# Altium PCB Agulhas.PcbDoc
Units mm, origin at the board's own origin, x right, y up, seen from the top; angles counter-clockwise.
Board outline 150 x 100 mm, 2 copper layers (Top Layer, Bottom Layer); 48 components, 30 nets, 135 pads, 0 vias.
Unrouted connection lines stored in the file: 3.
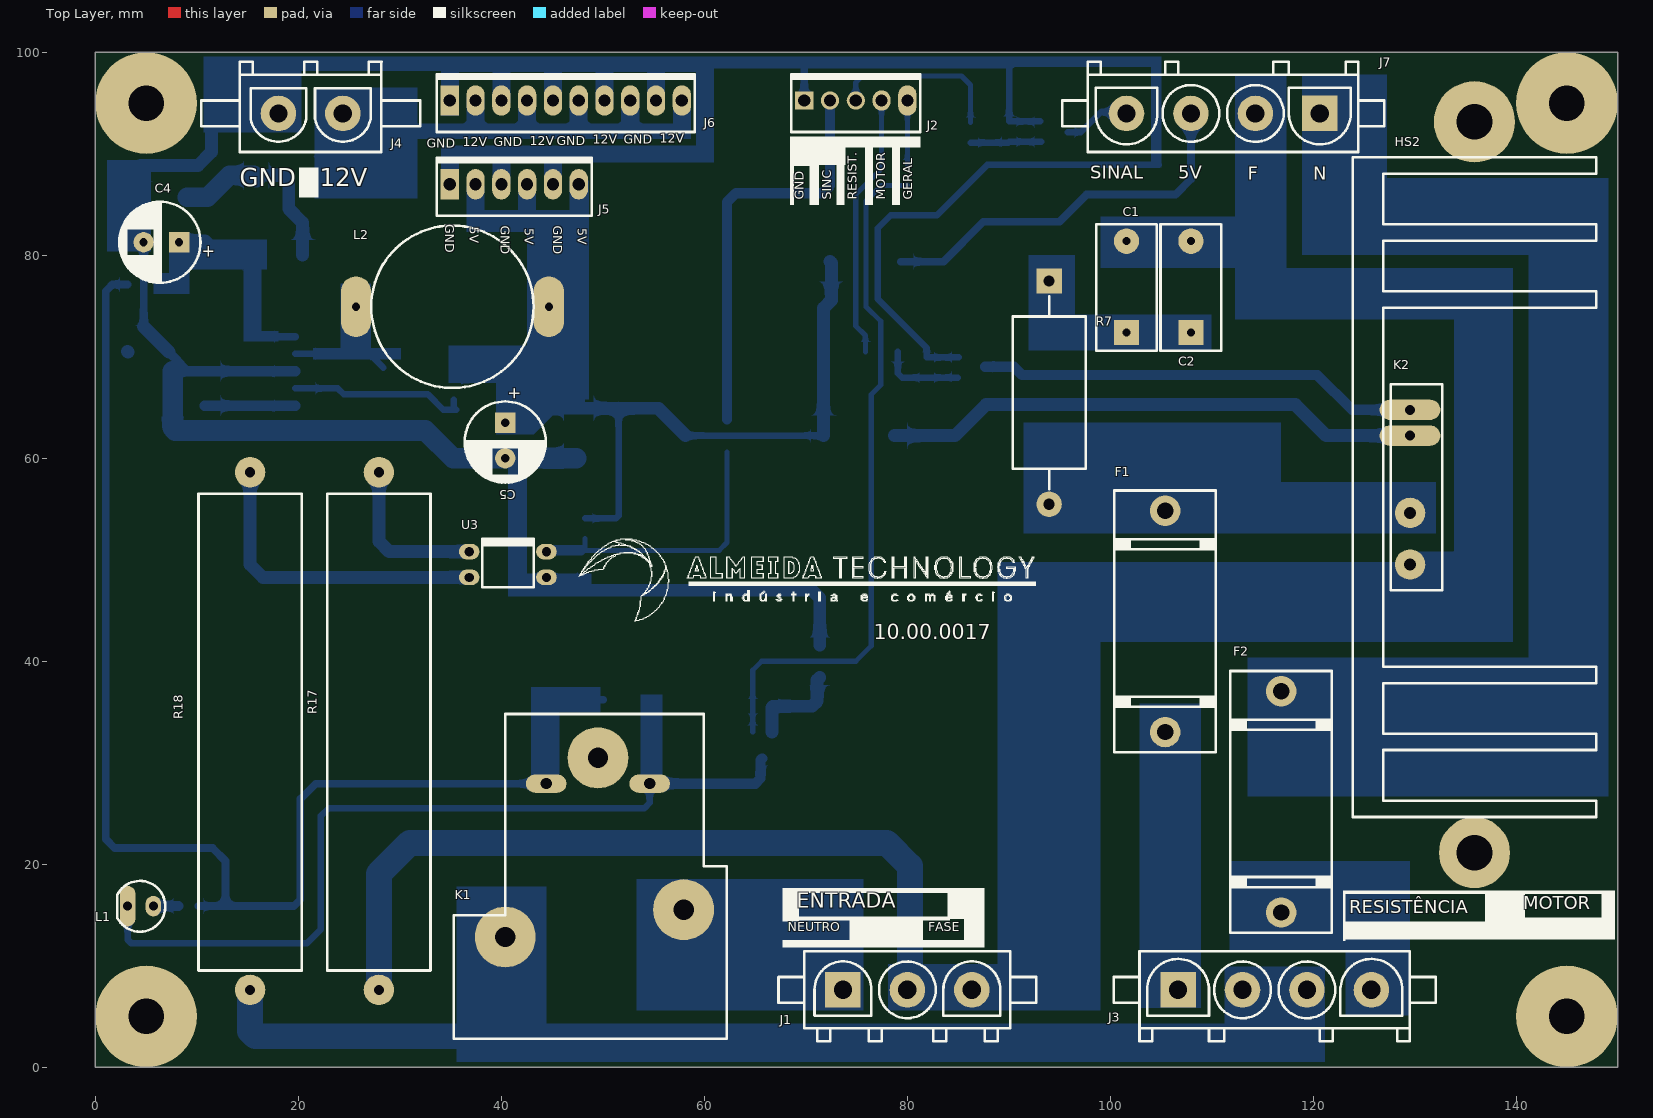
[diagram p0: Top Layer view]
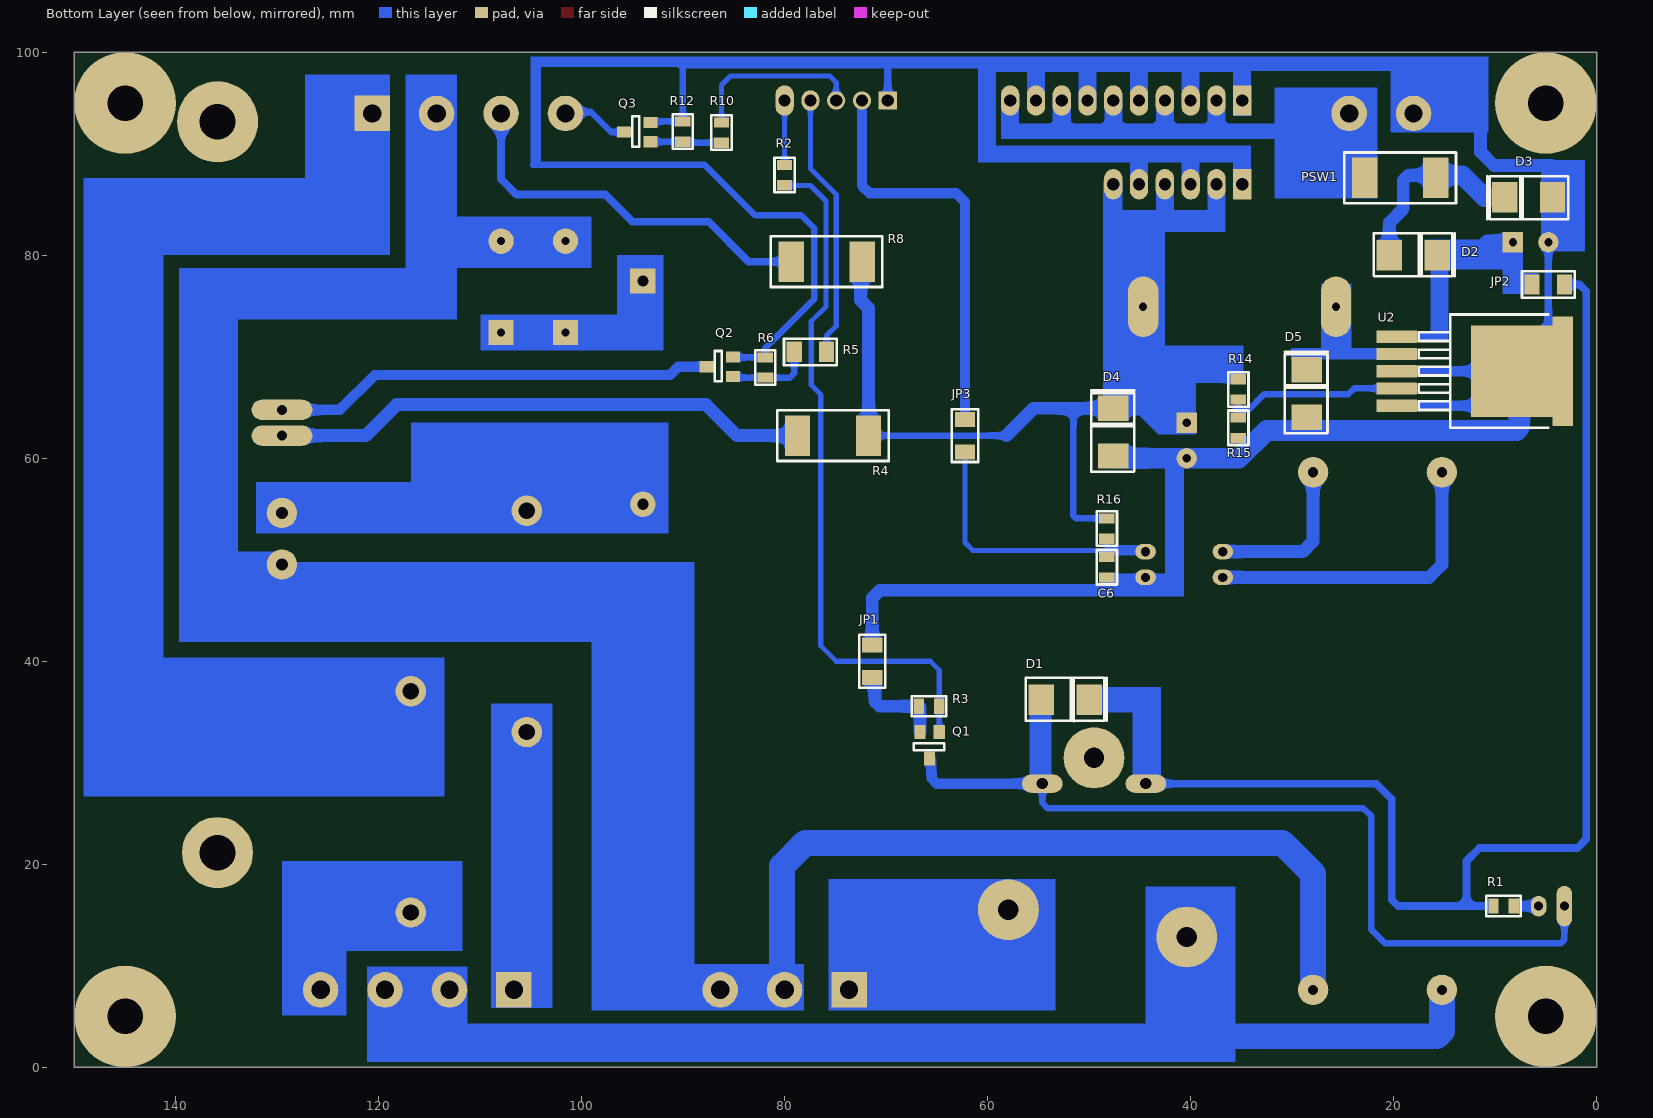
[diagram p1: Bottom Layer view, seen from below]
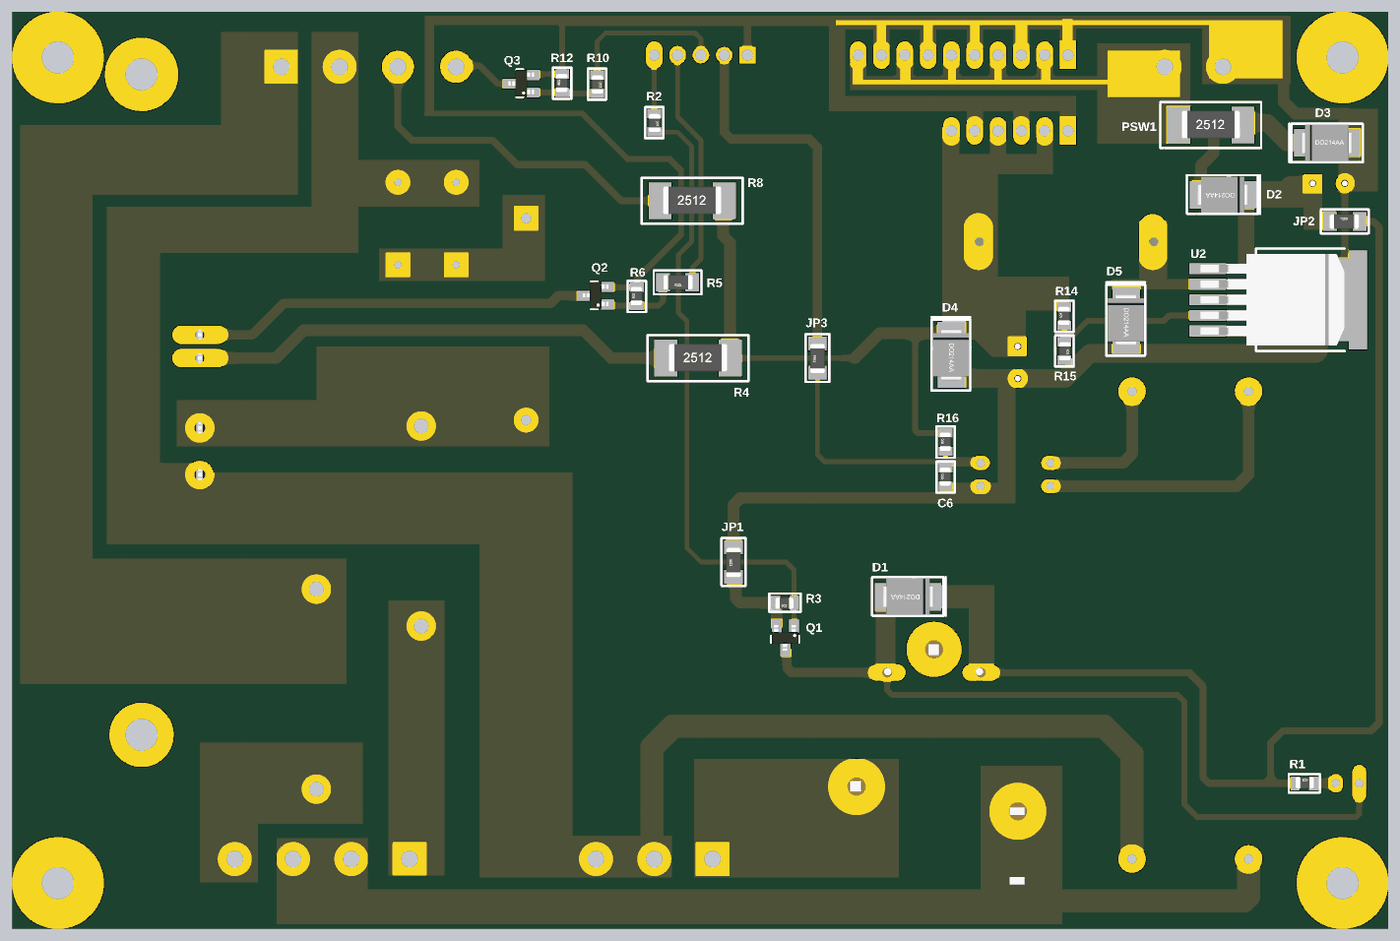
[diagram p2: 3D render of the assembled board from below, using the file's embedded part models]

## Layer stack, top to bottom
Top Solder: solder mask 0.0102, Solder Resist, Dk 3.5
Top Layer: signal copper 0.0356
Dielectric 1: dielectric 0.32, FR-4, Dk 4.8
Bottom Layer: signal copper 0.0356
Bottom Solder: solder mask 0.0102, Solder Resist, Dk 3.5

## Board outline
0,0 150,0 150,100 0,100

## Design rules (kind name [scope] priority, off if disabled: settings)
Clearance [All] p1: gap=0.508
PolygonConnect [All] p1: connectstyle=Relief reliefconductorwidth=0.254 reliefentries=4 polygonreliefangle="90 Angle" airgapwidth=0.254
RoomDefinition Sincronismo [InComponentClass('Sincronismo')] p1: confinementstyle=ConfineIn formatcopy=TRUE lockcomponents=FALSE outline -29.083,-63.881 21.717,-63.881 21.717,-38.481 -29.083,-38.481
RoomDefinition Regulador [InComponentClass('Regulador')] p2: confinementstyle=ConfineIn formatcopy=TRUE lockcomponents=FALSE outline -29.083,-63.881 21.717,-63.881 21.717,-38.481 -29.083,-38.481
RoomDefinition Potencia [InComponentClass('Potencia')] p3: confinementstyle=ConfineIn formatcopy=TRUE lockcomponents=FALSE outline -29.083,-63.881 21.717,-63.881 21.717,-38.481 -29.083,-38.481
RoomDefinition Conectores [InComponentClass('Conectores')] p4: confinementstyle=ConfineIn formatcopy=TRUE lockcomponents=FALSE outline -29.083,-63.881 21.717,-63.881 21.717,-38.481 -29.083,-38.481
RoutingVias [All] p1: holewidth=0.711 width=1.27 viastyle="Through Hole" minholewidth=0.711 minwidth=1.27 maxholewidth=0.711 maxwidth=1.27
SolderMaskExpansion [All] p1: expansion=0.102
UnpouredPolygon [All] p1: allowunpoured=FALSE
Width [All] p1: maxlimit=12.7 minlimit=0.254 preferedwidth=0.508
29 further rules are at their usual default settings.

## Classes and differential pairs
component class Sincronismo: C6 R16 R17 R18 U3
component class Regulador: C4 C5 D2 D3 D4 D5 J4 JP1 JP2 L2 PSW1 R14 R15 U2
component class Potencia: C1 C2 D1 F1 F2 HS2 J2 J7 JP3 K1 K2 L1 Q1 Q2 Q3 R1 R2 R3 R4 R5 R6 R7 R8 R10 R12
component class Conectores: J1 J3 J5 J6

## Components (designator, comment, footprint, x,y, rotation, side; value= is the part's Value field where it differs from the comment)
C1 "33nF/400V" "cap 330nF/250V" 101.6,72.39 r90 top
C2 "33nF/400V" "cap 330nF/250V" 107.95,72.39 r90 top
C4 "220uF/35V" "CAP POL 8x12mm" 8.255,81.28 r180 top
C5 "470uF/35V" "CAP POL 8x12mm" 40.386,63.5 r270 top
C6 "NM" "0805-REVISADO ONDA" 48.26,48.26 r90 bottom
D1 "1N4007-SMA" "SMB/DO214AA-REVISADO ONDA" 54.61,36.195 r180 bottom
D2 "1N4007-SMA" "SMB/DO214AA-REVISADO ONDA" 20.32,80.01 r180 bottom
D3 "SMBJ30.0A" "SMB/DO214AA-REVISADO ONDA" 4.445,85.725 r0 bottom
D4 "SMBJ5.0A" "SMB/DO214AA-REVISADO ONDA" 47.625,60.325 r90 bottom
D5 "1N5819-SOD80" "SMB/DO214AA-REVISADO ONDA" 28.575,64.135 r90 bottom
F1 "ZH242" ZH242_REVISADO 105.41,33.02 r90 top
F2 "ZH242" ZH242_REVISADO 116.84,15.24 r90 top
HS2 "HS 40mm TO-220PÉ" "dissipador grande" 135.89,57.15 r90 top
J1 "HYLOCK FÊMEA 3 VIAS PARA PCB" "CONECTOR HYLOCK 3 VIAS" 73.66,7.62 r0 top
J2 "PCMC2-5" PCMC2-5 69.85,95.25 r0 top
J3 "HYLOCK-FÊMEA 4 VIAS PARA PCB" "CONECTOR HYLOK 4 VIAS" 106.68,7.62 r0 top
J4 "HYLOCK 2 VIAS FÊMEA P/ PCB" "CONECTOR HYLOCK 2 VIAS" 24.384,93.98 r180 top
J5 "PCMC2-6" PCMC2-6 34.925,86.995 r0 top
J6 "PCMC2-10" PCMC2-10 34.925,95.25 r0 top
J7 "HYLOCK 4 VIAS PCB" "CONECTOR HYLOK 4 VIAS" 120.65,93.98 r180 top
JP1 "0R-1206-5%" "1206-REVISADO ONDA" 71.374,40.005 r90 bottom
JP2 "0R-1206-5%" "1206-REVISADO ONDA" 4.755,77.125 r180 bottom
JP3 "0R-1206-5%" "1206-REVISADO ONDA" 62.23,62.23 r90 bottom
K1 "RELE SLA-1-D-12" "rele gigante" 58.42,12.7 r90 top
K2 "S202S01" S202S02 129.54,49.53 r90 top
L1 "LED VERMELHO 5mm" LED100 4.445,15.875 r270 top
L2 "ferrite-CNF15+fio" "INDUTOR LOCO" 43.18,74.93 r180 top
PSW1 "NANOSMDC020F-2" "2512 - REVISADO ONDA" 22.86,87.63 r180 bottom
Q1 "BC846" "SOT23 - REVISADO ONDA" 64.77,33.02 r0 bottom
Q2 "BC846" "SOT23 - REVISADO ONDA" 85.09,68.072 r90 bottom
Q3 "BC846" "SOT23 - REVISADO ONDA" 93.218,91.186 r90 bottom
R1 "22K-0805-5%" "0805-REVISADO ONDA" 10.16,15.875 r180 bottom
R2 "10K-0805-5%" "0805-REVISADO ONDA" 80.01,88.9 r270 bottom
R3 "10K-0805-5%" "0805-REVISADO ONDA" 64.77,35.56 r0 bottom
R4 "220R-2512-5%" "2512 - REVISADO ONDA" 78.74,62.23 r180 bottom
R5 "10K-0805-5%" "1206-REVISADO ONDA" 77.47,70.485 r0 bottom
R6 "10K-0805-5%" "0805-REVISADO ONDA" 81.915,67.945 r90 bottom
R7 "47R-5W-5%" "RESISTOR 5W FIO" 93.98,77.47 r270 top
R8 "220R-2512-5%" "2512 - REVISADO ONDA" 79.375,79.375 r180 bottom
R10 "10K-0805-5%" "0805-REVISADO ONDA" 86.233,93.091 r270 bottom
R12 "10K-0805-5%" "0805-REVISADO ONDA" 90.043,91.186 r90 bottom
R14 "0R-0805-5%" "0805-REVISADO ONDA" 35.306,65.786 r90 bottom
R15 "NM" "0805-REVISADO ONDA" 35.306,64.008 r270 bottom
R16 "5K6-0805-5%" "0805-REVISADO ONDA" 48.26,52.07 r90 bottom
R17 "22K-10W-5%" "RESISTOR 10W CERAMICO" 27.94,7.62 r90 top
R18 "22K-10W-5%" "RESISTOR 10W CERAMICO" 15.24,7.62 r90 top
U2 "LM2575S-5.0" TO-263-5 5.842,68.58 r270 bottom
U3 "PC814" DIP-4 36.83,50.8 r0 top

## Footprints (in the part's own frame and the unit in brackets; to place one, negate y for a bottom-side part, rotate by r counter-clockwise, add the part's x,y. Pads: shape width x height; smd on the part's side, far side on the other; paste and mask are expansions set on the pad)
"0805-REVISADO ONDA" [mm]
  rect 1x1.5 smd: 1(0,0) 2(2,0)
  silkscreen extent -0.7,-1 2.7,1, body extent 0.04,-0.58 2.04,0.67, height 0.78
"1206-REVISADO ONDA" [mm]
  rect 1.5x2 smd: 1(-1.6,0) 2(1.6,0)
  silkscreen extent -2.6,-1.3 2.6,1.3, body extent -1.65,-0.81 1.55,0.79, height 1
"2512 - REVISADO ONDA" [mm]
  rect 2.5x4 smd: 1(0,0) 2(7,0)
  silkscreen extent -2,-2.5 9,2.5, body extent 0.33,-1.45 6.68,1.55, height 1.6
"cap 330nF/250V" [mm]
  rect 2.5x2.5 hole 0.8: 1(0,0)
  round 2.5 hole 0.8: 2(9,0)
  silkscreen extent -1.78,-3 10.67,3
"CAP POL 8x12mm" [mm]
  rect 2x2 hole 0.8: 1(0,0)
  round 2 hole 0.8: 2(3.5,0)
  silkscreen extent -2.1,-4 5.9,4, body extent -2.25,-3.97 5.75,4.03, height 12
"CONECTOR HYLOCK 2 VIAS" [mm]
  round 3.5 hole 1.8: 1(0,0) 2(6.35,0)
  silkscreen extent -7.62,-5.08 13.97,3.8
"CONECTOR HYLOCK 3 VIAS" [mm]
  rect 3.5x3.5 hole 1.8: 1(0,0)
  round 3.5 hole 1.8: 2(6.35,0) 3(12.7,0)
  silkscreen extent -6.35,-5.08 19.05,3.8
"CONECTOR HYLOK 4 VIAS" [mm]
  rect 3.5x3.5 hole 1.8: 1(0,0)
  round 3.5 hole 1.8: 2(6.35,0) 3(12.7,0) 4(19.05,0)
  silkscreen extent -6.35,-5.08 25.4,3.8
DIP-4 [mil] "DIP-4"
  oval 80x60 hole 36: 1(0,0) 2(0,-100) 3(300,-100) 4(300,0)
  silkscreen extent 50,-138 250,50
"dissipador grande" [mm]
  round 7 hole 3.5: ""(-36,0)
  round 8 hole 3.5: ""(36,0)
  silkscreen extent -32.5,-12 32.5,12
"INDUTOR LOCO" [mm]
  oval 3x6 hole 0.8: 1(-1.5,0) 2(17.5,0)
  silkscreen extent 0,-8 16,8, body extent -1.88,-7.47 18.12,7.53, height 13.1
LED100 [mm] "LED 5mm MONTADO NA VERTICAL"
  oval 2.032x1.524 hole 0.9: 1(0,1.27)
  oval 4x1.524 hole 0.9: 2(0,-1.27)
  silkscreen extent -2.48,-2.28 2.52,2.45
PCMC2-5 [mm] "KK 2,54mm 5 VIAS"
  rect 1.8x1.8 hole 1.2: 1(0,0)
  round 1.8 hole 1.2: 2(2.54,0) 3(5.08,0)
  oval 1.8x2 hole 1.2: 4(7.62,0)
  oval 1.8x3 hole 1.2: 5(10.16,0)
  silkscreen extent -1.27,-3.1 11.43,2.6
PCMC2-6 [mm]
  rect 1.8x3 hole 1.2: 1(0,0)
  oval 1.8x3 hole 1.2: 2(2.54,0) 3(5.08,0) 4(7.62,0) 5(10.16,0) 6(12.7,0)
  silkscreen extent -1.27,-3.1 13.97,2.6
PCMC2-10 [mm]
  rect 1.8x3 hole 1.2: 1(0,0)
  oval 1.8x3 hole 1.2: 2(2.54,0) 3(5.08,0) 4(7.62,0) 5(10.16,0) 6(12.7,0) 7(15.24,0) 8(17.78,0) 9(20.32,0) 10(22.86,0)
  silkscreen extent -1.27,-3.1 24.13,2.6
"rele gigante" [mm]
  oval 1.8x4 hole 1.1: 1(15.24,3.8) 2(15.24,14)
  round 6 hole 2: 3(0.127,18.034) 3'(17.78,8.9) 5(2.819,0.457)
  silkscreen extent -9.91,-3.81 22.1,23.11, body extent -9.91,-3.85 22.09,23.15, height 20.2
"RESISTOR 5W FIO" [mm] "RESISTOR 5W FIO"
  rect 2.5x2.5 hole 1.1: 1(0,0)
  round 2.5 hole 1.1: 2(22,0)
  silkscreen extent 1.5,-3.6 20.5,3.6
"RESISTOR 10W CERAMICO" [mm]
  round 3 hole 1: 1(0,0) 2(51,0)
  silkscreen extent 1.9,-5.08 48.89,5.08
S202S02 [mm]
  round 3 hole 1.2: 1(0,0) 2(5.08,0)
  oval 2x6 hole 1: 3(12.7,0) 4(15.24,0)
  silkscreen extent -2.54,-3.17 17.78,1.91, body extent -1.63,-3.86 16.87,1.65, height 29
"SMB/DO214AA-REVISADO ONDA" [mm]
  rect 2.5x3 smd: 1(-0.1,0) 2(4.599,0)
  silkscreen extent -1.65,-2.08 6.35,2.16, body extent -0.53,-1.94 5.06,2.01, height 2.6
"SOT23 - REVISADO ONDA" [mm]
  rect 1.1x1.4 smd: 1(0,0) 2(1.9,0) 3(0.95,2.6)
  silkscreen extent -0.5,1.1 2.5,1.8, body extent -0.45,-0.1 2.45,2.7, height 1.3
TO-263-5 [mm]
  rect 1.2x4 smd: 1(-3.4,-13.852) 2(-1.7,-13.852) 3(0,-13.852) 4(1.7,-13.852) 5(3.4,-13.852)
  rect 9x10 smd: 3(0,-1.524)
  rect 10.8x2 smd: 3(0,2.518)
  silkscreen extent -5.59,-11.68 5.59,1.07, body extent -5,-14.64 5,1.03, height 4.78
ZH242_REVISADO [mm] "PORTA FUSÍVEL ZH242 REVISADO EM 2015"
  round 3 hole 1.6: 1(0,0) 2(21.8,0)
  silkscreen extent -2,-5 23.8,5

## Part data
C1 C2 C6: library part 100nF/50-0805-NPO, "100nF/50-0805-NPO"
C4: library part 2200uF/50V, "2200uF/50V"
C5: library part 470uF/50V, "470uF/50V"
D1 D2: library part 1N4007, "1N4007"
F1 F2: library part "PORTA FUSÍVEL TIPO BERÇO", "PORTA FUSÍVEL TIPO BERÇO"
HS2: library part "DISSIPADOR 40mm PÉ"
J1: library part PCMC2-3, "PCMC2-3"
J3 J7: library part PCMC2-4, "PCMC2-4"
J4: library part PCMC2-2, "PCMC2-2"
JP1 JP2 JP3: library part 10R-0805-5%, "10R-0805-5%"
K1: library part AT1RC2, "AT1RC2"
K2: library part S102S12, "S102S12"
L2: library part "indutor 1mH CNF15", "1mH-CNF15-26 AWG"
PSW1: library part "POLYSWITCH 200mA"
Q1 Q2 Q3: "BC846L"
R1: library part 220R-2512-5%, "220R-2512-5%"
R14: library part 3K6-0805-1%, "3K6-0805-1%"
R15: library part 1K2-0805-1%, "1K2-0805-1%"
R16 R17 R18: library part 22K-0805-5%, "22K-0805-5%"
U2: library part LM2596S-ADJ, "LM2596S-ADJ"

## Free pads (board coordinates)
  round 10 hole 3.5: ""(5,5) ""(5,95) ""(144.997,5) ""(145,95)

## Nets (pads, with @x,y where several pads share a name; then routed paths per layer and width w, separated by ;. In a path a pad name is that pad's centre, name@x,y a point inside that pad or via, vN(x,y) a via of type N, cw(c..) or ccw(c..) an arc to the next point about the centre after c; other vN are vias at no path point)
5V: C5.1 D4.2 J5.2 J5.4 J5.6 L2.1 R4.2 R8.2 R14.2 R16.2 | length 113.2
  Bottom Layer w0.635: R16.2 51.276,54.07 51.562,54.356 51.562,64.924 ; 58.166,62.23 R4.2
  Bottom Layer w0.762: R14.2 39.91,67.786 40.386,67.31 C5.1
  Bottom Layer w1.27: J5.2 37.465,83.693 37.592,83.82 47.498,83.82 47.625,83.947 J5.6 ; C5.1 41.81,64.924 D4.2 ; 42.545,84.201 J5.4 ; 44.68,83.796 L2.1 44.68,69.874 47.625,66.929 D4.2 ; 58.166,62.23 55.472,64.924 51.562,64.924 D4.2 ; R4.2 71.74,74.788 72.517,75.565 72.517,79.233 R8.2
11V: C4.1 D1.2 D2.2 JP2.1 JP2.2 K1.2 R1.1 U2.1 | length 157.9
  Bottom Layer w0.762: JP2.2 1.687,77.125 1.27,76.708 1.016,76.454 1.016,75.946 1.016,22.479 1.905,21.59 11.557,21.59 12.827,20.32 12.827,15.875 ; JP2.1 7.529,77.125 8.128,77.724 8.128,81.153 C4.1 ; R1.1 12.827,15.875 ; D2.2 15.24,79.529 15.24,72.644 15.904,71.98 U2.1 ; D1.2 45.212,36.195 44.42,35.403 K1.2 21.717,27.94 20.193,26.416 20.193,16.51 19.558,15.875 12.827,15.875
  Bottom Layer w1.524: C4.1 10.795,81.28 12.065,80.01 D2.2
12V: J4.1 J6.2 J6.4 J6.6 J6.8 J6.10 PSW1.1 | length 55.2
  Bottom Layer w1.27: 24.765,91.44 30.48,91.44 31.242,92.202 37.465,92.202 ; J6.2 37.465,92.202 ; J6.4 42.545,92.202 ; J6.6 47.625,92.202 ; J6.8 52.705,92.202 ; J6.10 57.785,92.456 57.531,92.202 52.705,92.202 ; 37.465,92.202 42.545,92.202 ; 42.545,92.202 47.625,92.202 ; 47.625,92.202 52.705,92.202
  Bottom Layer w2.54: PSW1.1@22.86,87.884 22.86,89.535 24.13,90.805 24.13,93.726 J4.1
ENTRADA_FASE: C1.2 C2.2 J1.2 J1.3 J7.2 K2.1 R17.1 | length 247.8
  Bottom Layer w2.54: R17.1 27.94,19.05 30.988,22.098 77.978,22.098 80.264,19.812 80.264,7.874 J1.2 J1.3 88.9,7.62 91.44,10.16 91.44,41.91 92.71,43.18 135.89,43.18 137.16,44.45 137.16,49.53 ; J7.2 114.3,77.47 115.57,76.2 135.89,76.2 137.16,74.93 137.16,49.53 ; K2.1 137.16,49.53
GND: C4.2 C5.2 C6.1 D3.1 D4.1 D5.1 J2.1 J4.2 J5.1 J5.3 J5.5 J6.1 J6.3 J6.5 J6.7 J6.9 JP1.1 JP1.2 Q1.2 Q2.2 Q3.2 R3.2 R6.2 R12.2 R15.2 U2.3 U2.5 U3.3 | length 386.8
  Bottom Layer w0.635: 42.037,60 41.656,59.619 41.656,48.641 42.037,48.26 U3.3 C6.1 ; Q2.2@85.063,69.945 R6.2 81.915,70.866 77.089,75.692 77.089,82.677 78.359,83.947 82.931,83.947 87.884,88.9 104.775,88.9 ; Q3.2@93.118,93.186 R12.2 90.043,98.552 90.297,98.806 90.551,99.06 104.013,99.06 ; 104.648,89.789 104.648,99.187
  Bottom Layer w0.762: U2.3@4.755,72.969 C4.2 ; U2.3@7.239,70.485 U2.3@9.144,68.58 ; 58.674,98.806 59.436,98.806 90.297,98.806 ; J2.1 69.85,98.552
  Bottom Layer w1.016: U2.3@7.366,68.58 7.62,68.58 9.144,68.58 U2.3@19.694,68.58 ; U2.3@10.766,65.18 U2.5
  Bottom Layer w1.27: U2.3@3.175,70.507 U2.3@3.197,70.485 ; U2.3@4.755,72.969 U2.3@7.239,70.485 ; C4.2 4.445,81.59 4.445,88.857 10.117,88.857 11.43,90.17 11.43,93.345 12.065,93.98 J4.2 18.034,98.044 18.796,98.806 55.118,98.806 ; J5.1 34.925,90.043 35.052,90.17 59.182,90.17 ; J6.1 34.925,98.679 ; J5.3 40.005,90.043 ; J6.3 40.005,98.679 ; U3.3 45.72,46.99 70.612,46.99 71.374,46.228 JP1.2 ; J5.5 45.085,90.043 ; J6.5 45.085,98.679 ; J6.7 50.165,98.679 ; J6.9 55.245,98.679 55.118,98.806 ; 58.674,98.806 55.118,98.806 ; 59.436,98.806 59.828,98.414 59.828,90.816 ; Q1.2 R3.2@66.67,35.46 ; R3.2 70.612,35.56 71.12,36.068 71.12,38.151 JP1.1
  Bottom Layer w2.032: U2.3@7.62,68.58 7.62,62.992 7.874,62.738 32.512,62.738 35.25,60 C5.2 42.037,60 D4.1@47.4,60
NetC1_1: C1.1 C2.1 R7.1
NetD1_1: D1.1 K1.1 L1.2 Q1.3 | length 90.4
  Bottom Layer w0.635: L1.2 3.175,12.573 3.556,12.192 20.828,12.192 22.225,13.589 22.225,24.765 22.987,25.527 54.102,25.527 54.62,26.045 K1.1
  Bottom Layer w1.016: D1.1@54.62,36.105 K1.1 65.024,27.94 65.532,28.448 65.532,30.232 Q1.3
NetD2_1: D2.1 D3.2 PSW1.2 | length 19.3
  Bottom Layer w1.27: PSW1.2 16.114,87.884 18.542,87.884 19.05,87.376 19.05,84.582 20.42,83.212 D2.1
  Bottom Layer w1.905: D3.2 11.049,85.725 13.208,87.884 15.606,87.884 PSW1.2
NetD5_2: D5.2 L2.2 U2.2 | length 13.6
  Bottom Layer w0.635: U2.2 27.029,70.28 D5.2@28.37,68.939 ; 25.68,70.56 L2.2
NetF1_2: F1.2 K2.2 R7.2 | length 24.2
  Bottom Layer w2.54: F1.2 121.71,54.82 121.92,54.61 K2.2
NetF2_2: F2.2 J7.1 | length 103.6
  Bottom Layer w6.35: F2.2 142.45,37.04 144.78,39.37 144.78,82.55 143.51,83.82 124.46,83.82 123.19,85.09 123.19,93.98
NetJ2_3: J2.3 R10.1 | length 17.4
  Bottom Layer w0.508: J2.3 74.93,97.028 75.565,97.663 85.344,97.663 86.233,96.774 R10.1
NetJ2_4: J2.4 R5.1 | length 26.2
  Bottom Layer w0.508: R5.1 75.87,72.085 74.93,73.025 74.93,85.979 77.47,88.519 J2.4
NetJ2_5: J2.5 R2.1 | length 6.3
  Bottom Layer w0.508: R2.1 J2.5
NetJ7_3: J7.3 R8.1 | length 38.4
  Bottom Layer w0.762: R8.1 83.566,79.375 87.503,83.312 94.996,83.312 97.663,85.979 106.426,85.979 107.95,87.503 J7.3
NetJ7_4: J7.4 Q3.3 | length 6.8
  Bottom Layer w0.635: Q3.3 97.089,92.136 99.06,94.107 101.473,94.107 J7.4 J7.4@101.473,93.853
NetK2_3: K2.3 R4.1 | length 53.3
  Bottom Layer w1.27: R4.1 84.709,62.23 87.757,65.278 118.237,65.278 121.285,62.23 K2.3
NetK2_4: K2.4 Q2.3 | length 43.6
  Bottom Layer w1.016: Q2.3 90.49,69.022 91.313,68.199 120.396,68.199 123.825,64.77 K2.4
NetL1_1: L1.1 R1.2 | length 2.4
  Bottom Layer w1.016: L1.1 R1.2
NetQ1_1: Q1.1 R2.2 R3.1 | length 68.3
  Bottom Layer w0.508: Q1.1 R3.1 64.77,39.116 65.659,40.005 74.93,40.005 76.454,41.529 76.454,66.294 77.382,67.222 77.382,73.494 75.946,74.93 75.946,85.344 77.47,86.868 79.978,86.868 R2.2
NetQ2_1: Q2.1 R5.2 R6.1 | length 8.2
  Bottom Layer w0.635: R5.2 79.07,68.377 79.502,67.945 R6.1 Q2.1@84.963,67.945
NetQ3_1: Q3.1 R10.2 R12.1 | length 6.9
  Bottom Layer w0.635: R10.2 R12.1@89.948,91.091 ; R12.1 Q3.1
NetR14_1: R14.1 R15.1 U2.4 | length 17.9
  Bottom Layer w0.635: U2.4 23.876,66.88 24.462,66.294 32.766,66.294 34.29,64.77 35.56,64.77 35.306,65.024 R14.1
NetR17_2: R17.2 U3.1 | length 16.1
  Bottom Layer w1.27: R17.2 27.94,51.816 28.956,50.8 U3.1
NetR18_2: R18.2 U3.2 | length 31.2
  Bottom Layer w1.27: R18.2 15.24,49.53 16.51,48.26 U3.2
NEUTRO: J1.1 K1.5
NEUTRO_GERAL: J3.2 J3.3 K1.3 R18.1 | length 92.2
  Bottom Layer w2.54: R18.1 15.24,3.556 15.748,3.048 39.116,3.048 ; 59.69,2.54 111.76,2.54 113.03,3.81 J3.2 J3.3
SAIDA_MOTOR: F1.1 J3.1 | length 25.9
  Bottom Layer w2.54: F1.1 105.41,25.4 106.68,24.13 J3.1
SAIDA_RESISTENCIA: F2.1 J3.4 | length 15.8
  Bottom Layer w2.54: F2.1 124.46,15.24 125.73,13.97 J3.4
SINCRONISMO: C6.2 J2.2 JP3.1 JP3.2 R16.1 U3.4 | length 72.3
  Bottom Layer w0.508: U3.4 47.72,50.8 47.847,50.927 48.26,50.927 ; R16.1 48.26,50.927 ; JP3.1 62.23,51.689 61.468,50.927 48.26,50.927
  Bottom Layer w1.016: U3.4 44.577,50.927 47.847,50.927 ; JP3.2 62.23,85.217 63.119,86.106 71.628,86.106 72.39,86.868 J2.2
pads on no net: HS2. K1.3'

## Other copper
Bottom Layer:
  rectangle net 5V: 46.736,65.786 48.641,87.376
  rectangle net GND: 104.013,88.646 105.029,98.552
  rectangle net GND: 92.71,98.552 105.029,99.568
  rectangle net GND: 60.706,98.552 92.71,99.568
  rectangle net 5V: 34.798,67.437 42.799,71.12
  rectangle net 12V: 26.67,85.598 31.75,96.52
  rectangle net NetD1_1: 53.721,28.067 55.88,36.703
  rectangle net 11V: 42.926,34.925 49.784,37.465
  rectangle net 11V: 42.926,28.194 45.72,37.465
  rectangle net ENTRADA_FASE: 78.105,5.588 84.582,10.16
  rectangle net GND: 40.64,46.355 48.895,48.641
  rectangle net GND: 40.64,47.625 42.545,59.436
  rectangle net 5V: 39.497,62.357 43.18,68.199
  rectangle net GND: 44.196,86.868 45.974,89.662
  rectangle net GND: 39.116,86.995 40.894,89.408
  rectangle net GND: 34.036,88.265 35.814,90.297
  rectangle net GND: 59.309,89.154 60.96,99.568
  rectangle net GND: 34.036,89.154 60.96,90.805
  rectangle net 12V: 33.02,92.075 57.277,92.964
  rectangle net 12V: 21.59,85.598 26.67,96.52
  rectangle net 12V: 21.59,92.964 26.67,96.52
  rectangle net 12V: 21.59,91.44 33.02,92.964
  rectangle net GND: 10.668,92.075 20.32,98.933
  rectangle net GND: 10.668,98.933 34.036,99.568
  rectangle net 12V: 41.656,91.948 43.434,95.377
  rectangle net 12V: 46.736,91.948 48.514,95.25
  rectangle net 12V: 51.816,91.948 53.594,95.504
  rectangle net 12V: 56.896,91.44 58.674,95.25
  rectangle net 12V: 33.02,91.44 58.42,92.837
  rectangle net 12V: 33.02,91.44 38.862,92.837
  rectangle net 12V: 36.576,91.567 38.354,95.631
  rectangle net GND: 39.116,94.996 40.894,98.806
  rectangle net GND: 44.196,94.869 45.974,98.806
  rectangle net GND: 49.276,94.742 51.054,98.552
  rectangle net GND: 54.356,94.742 56.134,98.425
  rectangle net GND: 34.036,98.044 60.452,99.568
  rectangle net GND: 34.036,93.726 35.814,99.568
  rectangle net GND: 4.445,72.771 5.08,80.645
  rectangle net 5V: 41.656,82.931 43.434,87.122
  rectangle net 5V: 36.576,82.423 38.354,86.868
  rectangle net 5V: 36.576,82.296 48.26,84.455
  rectangle net 5V: 42.545,64.897 48.26,83.82
  rectangle net GND: 1.143,80.391 5.461,89.408
  rectangle net 11V: 14.605,72.517 16.383,79.248
  rectangle net 11V: 14.605,71.501 18.034,72.517
  rectangle net 11V: 7.747,78.613 16.891,81.534
  rectangle net 11V: 7.239,78.232 9.271,82.296
  rectangle net 11V: 5.715,76.2 9.271,78.232
  rectangle net NetD5_2: 24.13,69.85 27.178,77.216
  rectangle net NetD5_2: 21.463,69.723 30.099,70.866
  rectangle net ENTRADA_FASE: 99.06,78.74 101.6,83.82
  rectangle net NetC1_1: 91.948,74.168 96.52,80.01
  rectangle net NetC1_1: 91.948,70.612 109.982,74.168
  rectangle net NetF1_2: 91.44,52.578 93.98,63.5
  rectangle net ENTRADA_FASE: 101.6,78.74 115.57,83.82
  rectangle net NetF1_2: 93.98,52.578 103.632,63.5
  rectangle net NetF1_2: 101.6,52.832 116.84,63.5
  rectangle net ENTRADA_FASE: 133.858,46.228 137.414,74.676
  rectangle net NetF2_2: 113.538,26.67 149.098,37.338
  rectangle net SAIDA_RESISTENCIA: 123.19,5.08 129.54,11.43
  rectangle net SAIDA_RESISTENCIA: 111.76,11.43 129.54,20.32
  rectangle net SAIDA_RESISTENCIA: 111.76,12.192 125.73,20.32
  rectangle net NEUTRO: 53.34,5.588 75.692,18.542
  rectangle net NEUTRO_GERAL: 35.56,4.318 44.45,17.78
  rectangle net NEUTRO_GERAL: 35.56,0.508 54.356,4.318
  rectangle net ENTRADA_FASE: 93.98,5.588 99.06,43.688
  rectangle net NEUTRO_GERAL: 54.356,0.508 121.158,4.318
  rectangle net NEUTRO_GERAL: 111.252,0.508 121.158,9.906
  rectangle net NetF1_2: 102.87,52.578 132.08,57.658
  rectangle net SAIDA_RESISTENCIA: 115.062,12.954 123.444,17.272
  rectangle net SAIDA_RESISTENCIA: 123.444,5.588 128.016,17.272
  rectangle net SAIDA_MOTOR: 107.188,5.842 108.966,35.814
  rectangle net SAIDA_MOTOR: 102.87,5.842 108.458,35.814
  rectangle net ENTRADA_FASE: 84.582,5.588 93.98,10.16
  rectangle net ENTRADA_FASE: 88.9,5.588 93.98,49.784
  rectangle net ENTRADA_FASE: 88.9,41.91 134.62,49.784
  rectangle net ENTRADA_FASE: 134.62,41.91 139.7,78.74
  rectangle net ENTRADA_FASE: 117.348,73.66 139.7,78.74
  rectangle net ENTRADA_FASE: 112.268,73.66 117.348,97.79
  rectangle net NetF2_2: 113.538,32.766 141.224,40.386
  rectangle net NetF2_2: 141.224,32.766 149.098,87.63
  rectangle net NetF2_2: 127.254,80.01 149.098,87.63
  rectangle net NetF2_2: 118.872,80.01 127.254,97.79
  region net 5V: 43.18,62.357 45.085,64.262 46.101,64.262 46.101,65.913 45.593,66.421 42.291,66.421

## Silkscreen, mask and mechanical layers (free items; w line width, h text height)
Top Overlay:
  drawing of 2149 lines, arcs and shapes, not listed
  text "12V" at 55.626,90.805 h1.52
  text "12V" at 49.022,90.678 h1.52
  text "GND" at 52.07,90.678 h1.52
  text "12V" at 42.799,90.551 h1.52
  text "GND" at 45.466,90.551 h1.52
  text "12V" at 36.195,90.424 h1.52
  text "GND" at 39.243,90.424 h1.52
  text "GND" at 32.639,90.297 h1.52
  text "SINAL" at 98.044,87.122 h2.2
  text "5V" at 106.68,87.122 h2.2
  text "F" at 113.538,86.995 h2.2
  text "N" at 120.015,86.995 h2.2
  text "GND" at 14.224,86.233 h3
  text "12V" at 22.098,86.233 h3
  text "GND" at 70.115,85.471 h1.52 r90
  text "SINC" at 72.782,85.471 h1.52 r90
  text "RESIST." at 75.322,85.471 h1.52 r90
  text "MOTOR" at 78.116,85.471 h1.52 r90
  text "GERAL" at 80.783,85.471 h1.52 r90
  text "GND" at 34.163,83.058 h1.52 r270
  text "GND" at 39.624,82.931 h1.52 r270
  text "GND" at 44.831,82.931 h1.52 r270
  text "5V" at 36.576,82.804 h1.52 r270
  text "5V" at 42.037,82.677 h1.52 r270
  text "5V" at 47.244,82.677 h1.52 r270
  text "10.00.0017" at 76.708,41.656 h2.5
  text "ENTRADA" at 69.088,15.24 h2.5
  text "MOTOR" at 140.716,15.113 h2.2
  text "RESISTÊNCIA" at 123.571,14.732 h2.2
  text "NEUTRO" at 68.199,13.081 h1.52
  text "FASE" at 82.042,13.081 h1.52
Bottom Solder:
  rectangle: 36.83,92.329 37.846,95.504
  rectangle: 42.164,92.202 42.926,95.25
  rectangle: 47.117,92.456 48.006,95.377
  rectangle: 52.07,92.202 53.213,95.25
  rectangle: 57.277,92.075 58.42,95.25
  rectangle: 30.353,92.075 58.42,92.583
  rectangle: 54.737,94.742 55.753,98.806
  rectangle: 49.657,94.615 50.673,98.806
  rectangle: 44.577,94.742 45.593,98.806
  rectangle: 39.37,94.869 40.64,98.806
  rectangle: 34.417,94.742 35.56,99.187
  rectangle: 19.558,98.552 60.198,99.06
  rectangle: 22.733,90.678 30.607,95.758
  rectangle: 11.557,92.71 19.558,99.06
Mechanical 1:
  lines w0.254: 0,0 0,100 ; 0,0 150,0 ; 0,0 0,-5 150,-5 150,0 ; 0,100 150,100 ; 0,100 0,105 150,105 150,100 ; 150,0 150,100
  lines w1: 11.684,10.541 18.796,10.541 ; 13.843,60.96 30.607,60.96 30.607,56.134 ; 25.781,13.716 25.781,20.828 ; 37.465,24.511 63.246,24.511 ; 38.989,45.974 38.989,53.086 ; 54.61,19.431 61.722,19.431 ; 99.06,84.709 106.172,84.709
  text "BORDA P/ FIXAÇÃO NO PALLET DE MONTAGEM" at 51.816,101.6 h2.5
  text "BORDA P/ FIXAÇÃO NO PALLET DE MONTAGEM" at 49.784,-3.302 h2.5
  text "TRILHAS NO DO LAYER GLOBAL NO INTERIOR DA PLACA INDICAM FRESAGEM COM FERRAMENTA DE 1mm DE DIÂMETRO" at 5.969,-10.795 h2.5

## Text inside footprints (layer, text, board x,y; h text height)
C4: Top Overlay "+" at 11.811,81.28 h2 r180
C5: Top Overlay "+" at 40.386,67.056 h2 r270